# Altium PCB PCB_split_action.PcbDoc
Units mm, origin at the board's own origin, x right, y up, seen from the top; angles counter-clockwise.
Board outline 29.5 x 28 mm, 2 copper layers (Top Layer, Bottom Layer); 6 components, 6 nets, 16 pads, 0 vias.
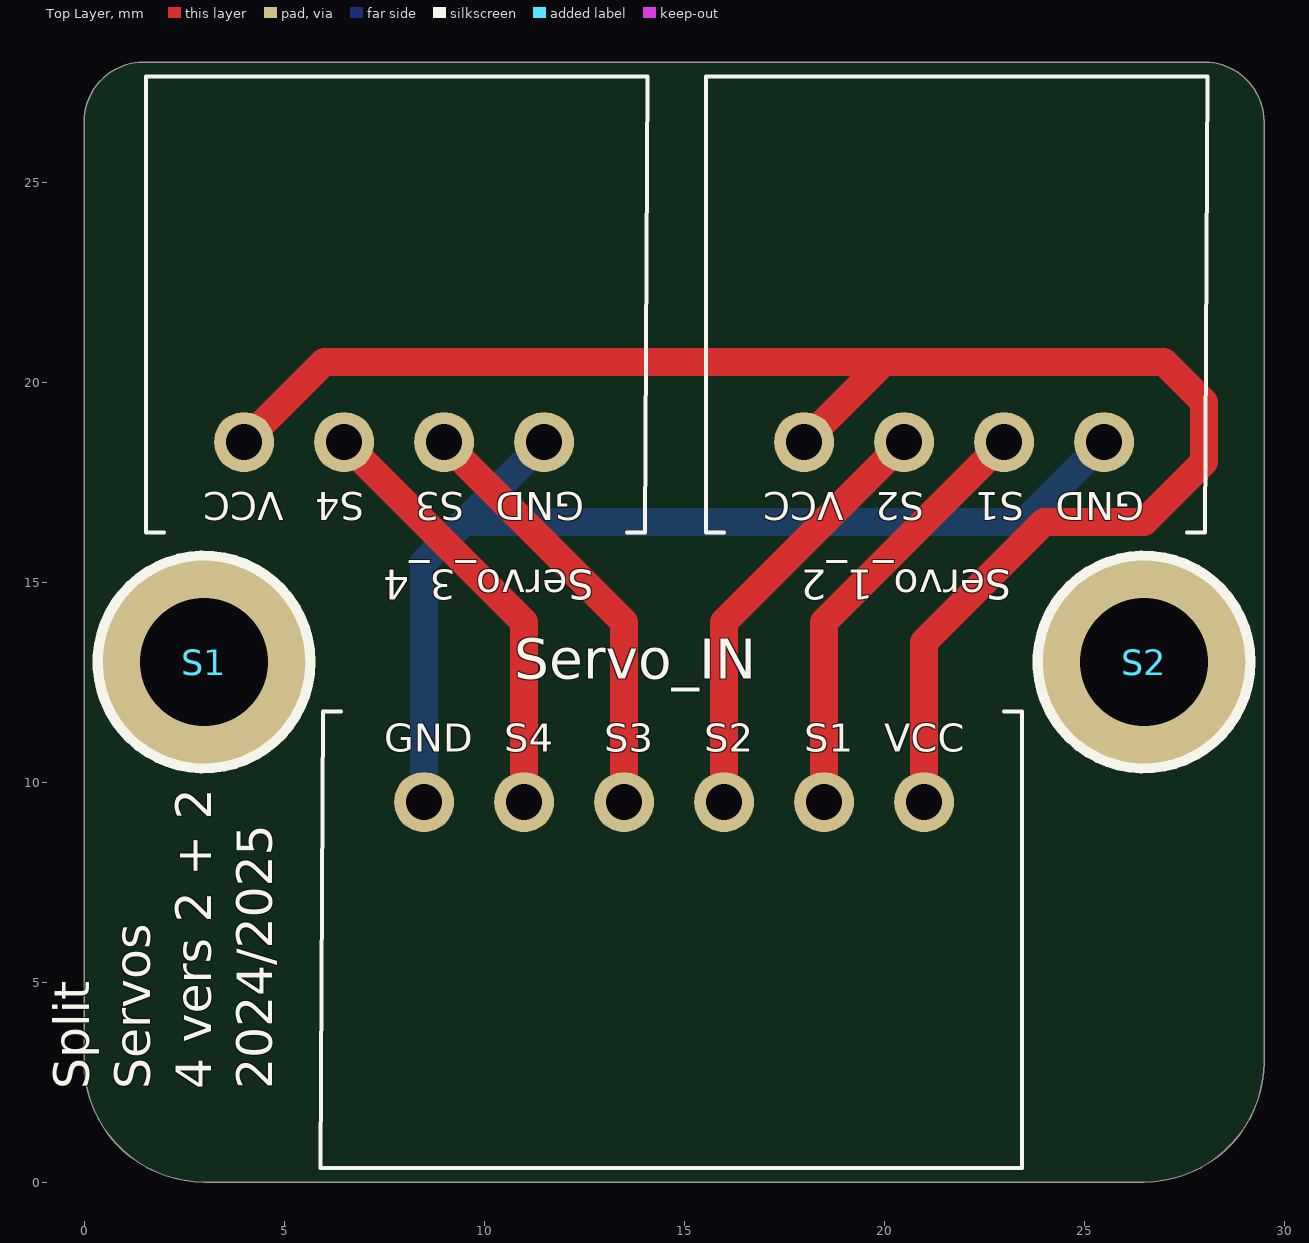
[diagram p0: Top Layer view]
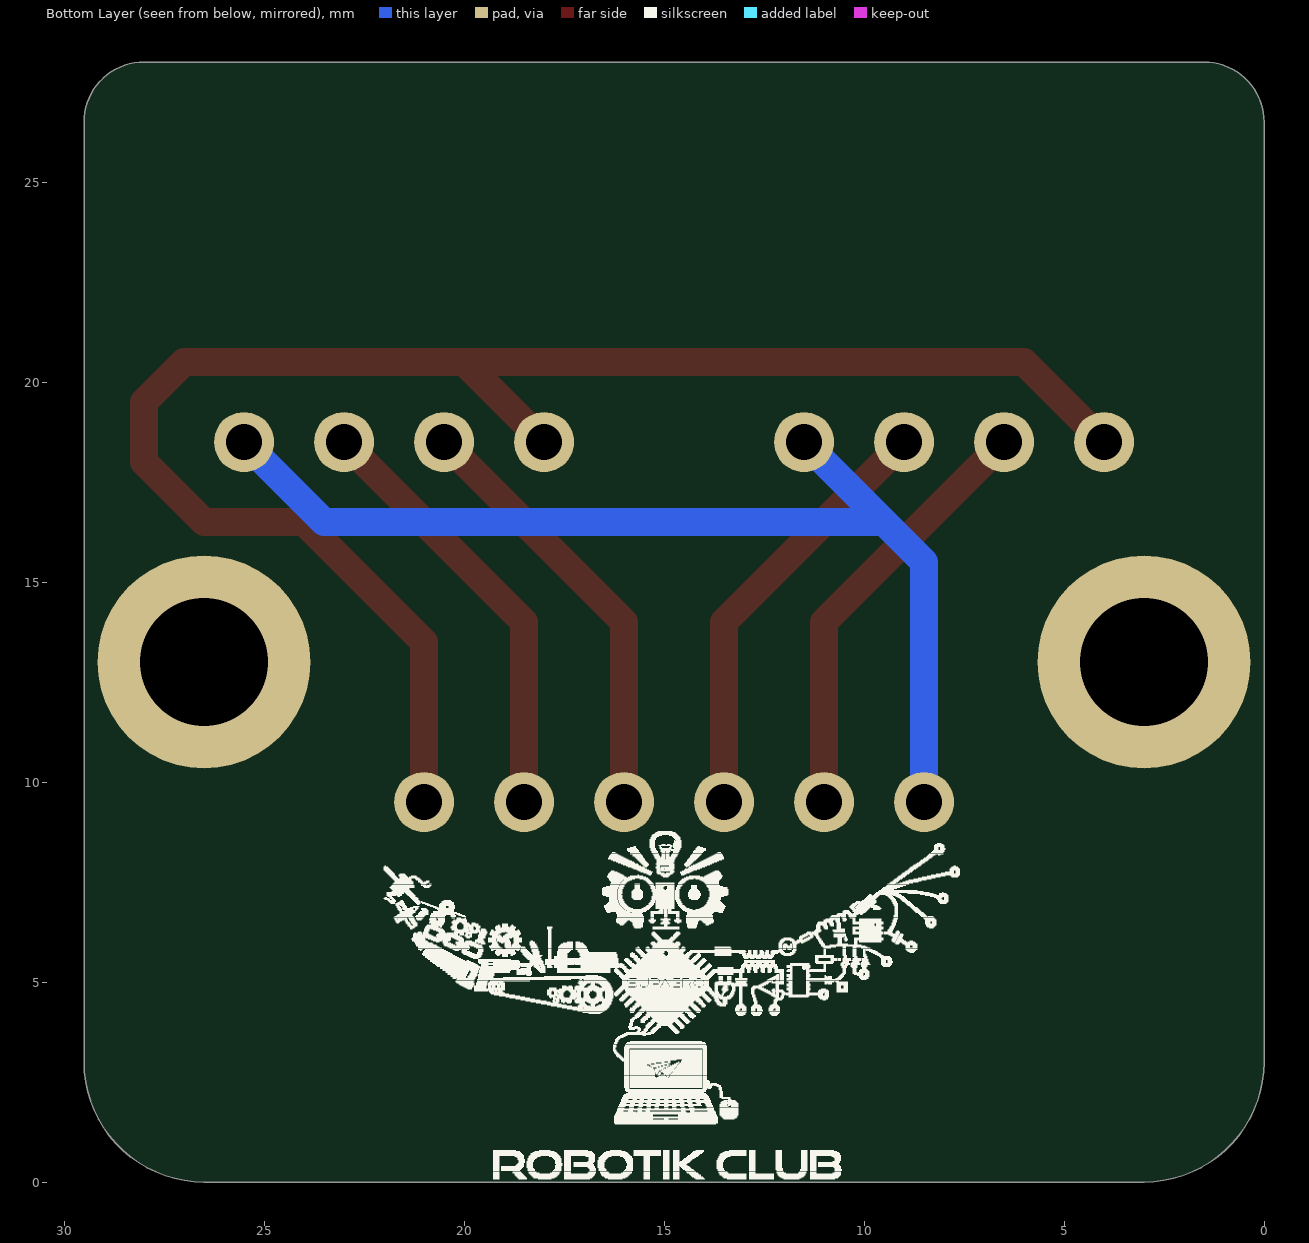
[diagram p1: Bottom Layer view, seen from below]
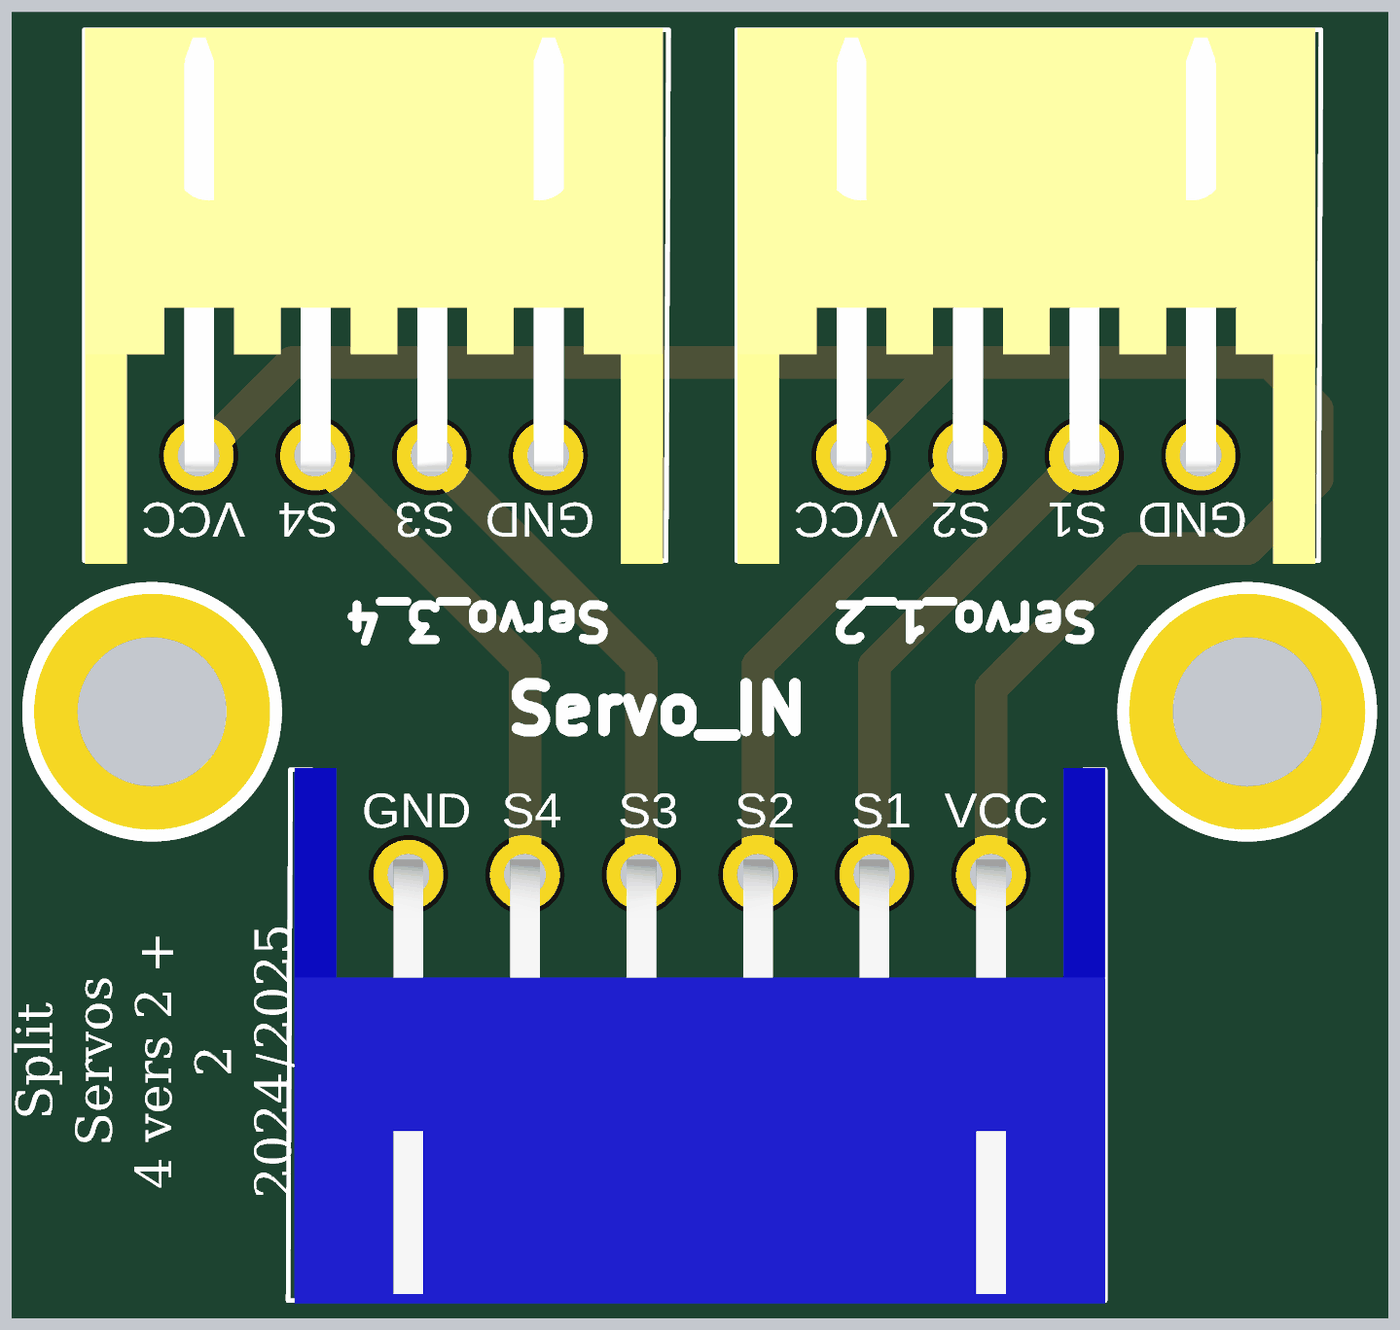
[diagram p2: 3D render of the assembled board from above, using the file's embedded part models]

## Layer stack, top to bottom
Top Solder: solder mask 0.0102, Solder Resist, Dk 3.5
Top Layer: signal copper 0.0356
Dielectric 1: dielectric 0.32, FR-4, Dk 4.8
Bottom Layer: signal copper 0.0356
Bottom Solder: solder mask 0.0102, Solder Resist, Dk 3.5

## Board outline
3,0 26.5,0 ccw(c26.5,3) 29.5,3 29.5,26.5 ccw(c28,26.5) 28,28 1.5,28 ccw(c1.5,26.5) 0,26.5 0,3 ccw(c3,3)

## Design rules (kind name [scope] priority, off if disabled: settings)
Clearance [All] p1: gap=0.254 ignorepadtopadclearanceinfootprint=FALSE
PolygonConnect [All] p1: connectstyle=Relief reliefconductorwidth=0.254 reliefentries=4 polygonreliefangle="90 Angle" airgapwidth=0.254
RoutingVias [All] p1: holewidth=0.711 width=1.27 viastyle="Through Hole" minholewidth=0.711 minwidth=1.27 maxholewidth=0.711 maxwidth=1.27
SolderMaskExpansion [All] p1: expansion=0.102 istentingtop=FALSE
SupplyNets "Schematic Supply Nets_1" [InNet('VCC')] p1: voltage=0.000
SupplyNets "Schematic Supply Nets" [InNet('GND')] p2: voltage=0.000
Width [All] p1: maxlimit=0.7 minlimit=0.254 preferedwidth=0.7
30 further rules are at their usual default settings.

## Classes and differential pairs
component class SchemaSplit: S1 S2 Servo_1_2 Servo_IN

## Components (designator, comment, footprint, x,y, rotation, side; value= is the part's Value field where it differs from the comment)
S1 "Screw M3" "Screw M3" 3,13 r0 top
S2 "Screw M3" "Screw M3" 26.5,13 r0 top
Servo_1_2 "Header 4H" S4B-XH-A 18,18.5 r0 top
Servo_3_4 "Header 4H" S4B-XH-A 4,18.5 r0 top
Servo_IN "Header 6H" S6B-XH-A 21,9.5 r180 top
? "Comment" Logo_lowres 15,5 r180 bottom

## Footprints (in the part's own frame and the unit in brackets; to place one, negate y for a bottom-side part, rotate by r counter-clockwise, add the part's x,y. Pads: shape width x height; smd on the part's side, far side on the other; paste and mask are expansions set on the pad)
Logo_lowres [mm]
  silkscreen extent -7.01,-4.93 7.39,3.76
S4B-XH-A [mm]
  round 1.5 hole 0.9: 1(0,0) 2(2.5,0) 3(5,0) 4(7.5,0)
  silkscreen extent -2.45,-2.26 10.08,9.14, body extent -2.44,-2.32 9.96,9.18, height 6.15
S6B-XH-A [mm]
  round 1.5 hole 0.9: 1(0,0) 2(2.5,0) 3(5,0) 4(7.5,0) 5(10,0) 6(12.5,0)
  silkscreen extent -2.45,-2.26 15.08,9.14, body extent -2.45,-2.3 14.95,9.2, height 6.15
"Screw M3" [mm] "M3 iso Screw"
  round 5.32 hole 3.2 unplated: 0(0,0)
  silkscreen extent -2.66,-2.66 2.66,2.66

## Part data
Servo_1_2 Servo_3_4: "Header, 4-Pin, Right Angle", LatestRevisionDate=17-Jul-2002, LatestRevisionNote="Re-released for DXP Platform.", Publisher="Altium Limited"
Servo_IN: "Header, 6-Pin, Right Angle", LatestRevisionDate=17-Jul-2002, LatestRevisionNote="Re-released for DXP Platform.", Publisher="Altium Limited"

## Nets (pads, with @x,y where several pads share a name; then routed paths per layer and width w, separated by ;. In a path a pad name is that pad's centre, name@x,y a point inside that pad or via, vN(x,y) a via of type N, cw(c..) or ccw(c..) an arc to the next point about the centre after c; other vN are vias at no path point)
GND: Servo_1_2.4 Servo_3_4.4 Servo_IN.6 | length 27.1
  Bottom Layer w0.7: Servo_IN.6 8.5,15.5 9.5,16.5 ; Servo_3_4.4 9.5,16.5 ; Servo_1_2.4 23.5,16.5 9.5,16.5
S_IN_1: Servo_1_2.3 Servo_IN.2 | length 10.9
  Top Layer w0.7: Servo_IN.2 18.5,14 Servo_1_2.3
S_IN_2: Servo_1_2.2 Servo_IN.3 | length 10.9
  Top Layer w0.7: Servo_IN.3 16,14 Servo_1_2.2
S_IN_3: Servo_3_4.3 Servo_IN.4 | length 10.9
  Top Layer w0.7: Servo_3_4.3 13.5,14 Servo_IN.4
S_IN_4: Servo_3_4.2 Servo_IN.5 | length 10.9
  Top Layer w0.7: Servo_3_4.2 11,14 Servo_IN.5
VCC: Servo_1_2.1 Servo_3_4.1 Servo_IN.1 | length 42.4
  Top Layer w0.7: Servo_3_4.1 6,20.5 20,20.5 ; Servo_1_2.1 20,20.5 ; Servo_IN.1 21,13.5 24,16.5 26.5,16.5 28,18 28,19.5 27,20.5 20,20.5
pads on no net: S1.0 S2.0

## Silkscreen, mask and mechanical layers (free items; w line width, h text height)
Top Overlay:
  text "VCC" at 4.999,17.487 h1.2 r180
  text "S4" at 7,17.487 h1.2 r180
  text "S3" at 9.5,17.487 h1.2 r180
  text "GND" at 12.5,17.487 h1.2 r180
  text "VCC" at 18.999,17.487 h1.2 r180
  text "S2" at 21,17.487 h1.2 r180
  text "S1" at 23.5,17.487 h1.2 r180
  text "GND" at 26.5,17.487 h1.2 r180
  text "GND" at 7.5,10.513 h1.2
  text "S4" at 10.5,10.513 h1.2
  text "S3" at 13,10.513 h1.2
  text "S2" at 15.5,10.513 h1.2
  text "S1" at 18,10.513 h1.2
  text "VCC" at 20.001,10.513 h1.2
  text "Split / Servos / 4 vers 2 + 2 / 2024/2025" at 5,2.323 h1.52 r90
Mechanical 1:
  the board outline again, w0.254